# Altium PCB shoe-board-pcb.pcbdoc
Units mm, origin at the board's own origin, x right, y up, seen from the top; angles counter-clockwise.
Board outline 100.89 x 49.4 mm, 2 copper layers (Top Layer, Bottom Layer); 80 components, 95 nets, 252 pads, 198 vias.
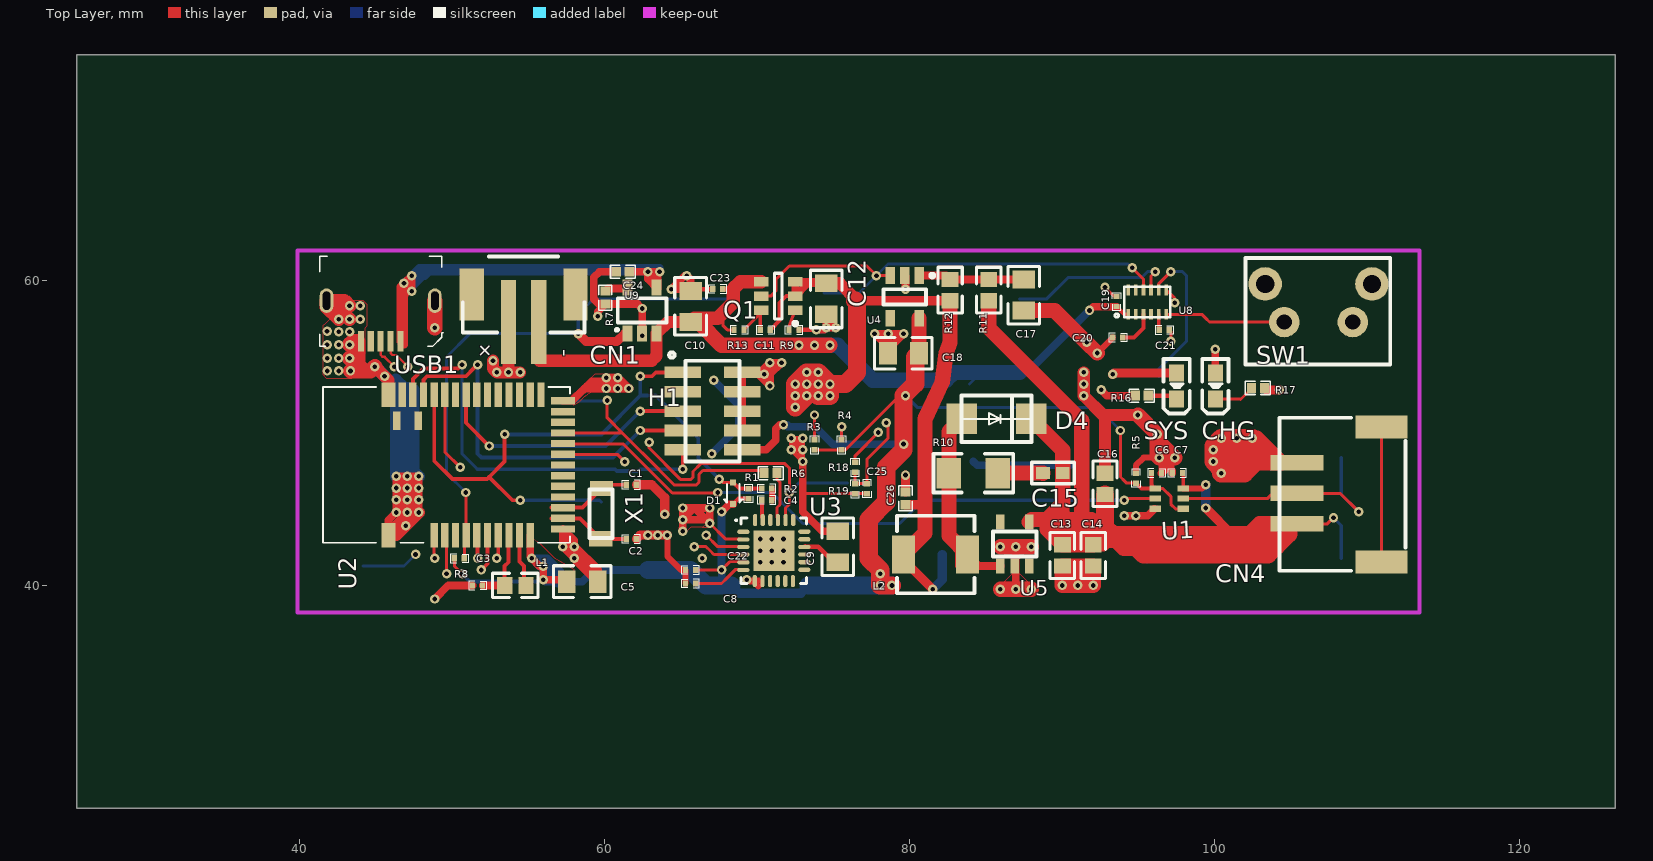
[diagram p0: Top Layer view]
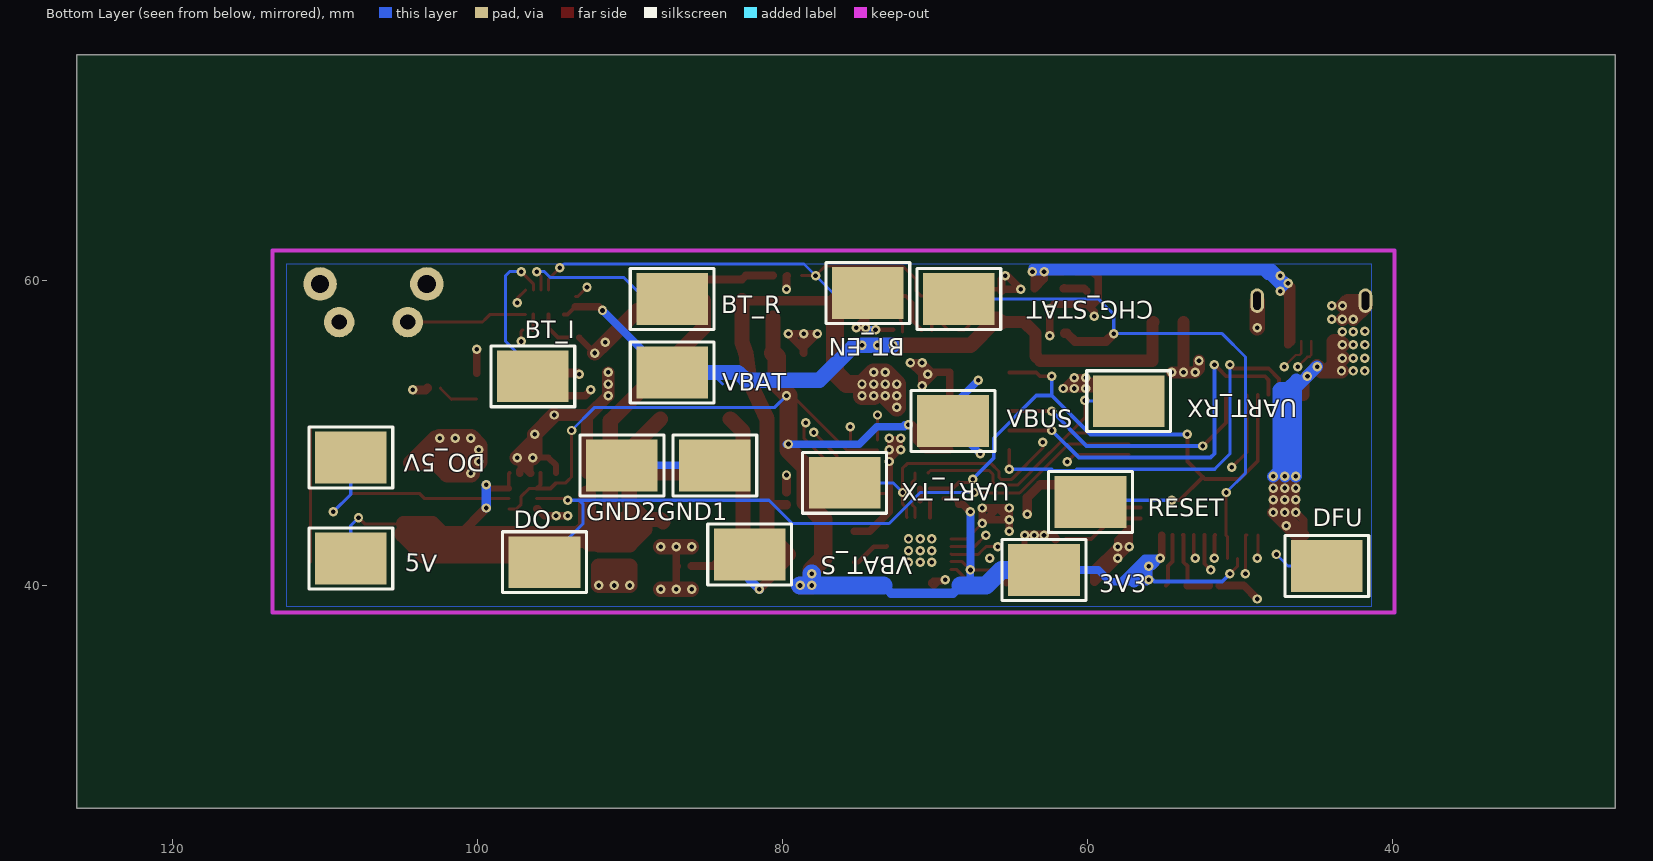
[diagram p1: Bottom Layer view, seen from below]

## Layer stack, top to bottom
Top Layer: signal copper (thickness not stored)
Dielectric: dielectric 0.32, FR-4, Dk 4.8
Bottom Layer: signal copper (thickness not stored)

## Board outline
126.285,25.4 25.4,25.4 25.4,74.803 126.285,74.803

## Components (designator, comment, footprint, x,y, rotation, side; value= is the part's Value field where it differs from the comment)
3V3 "TESTPOINT" undefined#1 62.854,41.021 r0 bottom
5V "TESTPOINT" TESTPOINT_SMT 108.32,41.783 r0 bottom
BT_EN "TESTPOINT" undefined#1 74.411,59.182 r0 bottom
BT_I "TESTPOINT" undefined#1 96.382,53.721 r0 bottom
BT_R "TESTPOINT" undefined#1 87.238,58.801 r0 bottom
C1 "22pF" 0201#1 61.838,46.609 r180 top
C2 "22pF" undefined#2 61.838,43.053 r180 top
C3 "1uF" 0201#2 51.678,40.005 r0 top
C4 "100nF" undefined#2 70.728,45.593 r180 top
C5 "10uF" 0805 58.536,40.259 r180 top
C6 "100nF" undefined#2 96.128,47.371 r0 top
C7 "100nF" undefined#2 97.652,47.371 r180 top
C8 "100nF" 0201#2 65.648,40.132 r180 top
C9 "10uF" undefined#3 75.3,42.545 r270 top
C10 "10uF" undefined#3 65.648,58.293 r270 top
C11 "470pF" undefined#2 70.474,56.769 r0 top
C12 "10uF" undefined#3 74.538,58.801 r90 top
C13 "10uF" undefined#4 90.032,42.037 r90 top
C14 "10uF" undefined#4 92.064,42.037 r90 top
C15 "330pF" C0402 89.524,47.371 r0 top
C16 "10uF" undefined#4 92.826,46.609 r270 top
C17 "10uF" undefined#3 87.492,59.055 r90 top
C18 "10uF" undefined#3 79.618,55.245 r0 top
C19 "100nF" undefined#2 93.588,58.547 r90 top
C20 "1uF" 0201#2 93.667,56.261 r0 top
C21 "100nF" undefined#2 96.636,56.769 r0 top
C22 "100nF" 0201#2 65.648,41.021 r180 top
C23 "1uF" 0201#2 67.426,59.436 r180 top
C24 "4.7uF" 0402#1 61.203,60.579 r180 top
C25 "100nF" 0201#2 77.205,46.355 r270 top
C26 "2.2uF" 0402#1 79.745,45.72 r270 top
CHG "FC-1608YOXK-600H08" LED-0603 100.065,53.086 r90 top
CHG_STAT "TESTPOINT" undefined#1 68.442,58.801 r0 bottom
CN1 "JST_2PIN-SMT" JST-PH-2-SMT 54.726,58.293 r0 top
CN4 "S3B-PH-SM4-TB(LF)(SN)" S3B-PH-SM4-TB(LF)(SN) 108.193,45.974 r270 top
D1 "1N4148WT-7" SOD-523 68.442,46.101 r270 top
D4 "SK24" SMA 85.714,50.927 r0 top
DFU "TESTPOINT" TESTPOINT_SMT 44.312,41.275 r0 bottom
DO "TESTPOINT" undefined#1 95.62,41.529 r0 bottom
DO_5V "TESTPOINT" undefined#1 108.32,48.387 r0 bottom
GND1 "TESTPOINT" TESTPOINT_SMT 84.444,47.879 r0 bottom
GND2 "TESTPOINT" TESTPOINT_SMT 90.54,47.879 r0 bottom
H1 "20021121-00010C4LF" SMD-1.27MM-10P-AMPHENOL-H4.55 67.172,51.435 r270 top
L1 "10uH" undefined#4 54.218,40.005 r0 top
L2 "2.2uH" SMD-5X5-0503 81.65,42.037 r0 top
Q1 "NTGD1100LT1G" ONSC-TSOP-6-318G-02_V 71.49,59.055 r180 top
R1 "10KΩ" undefined#2 69.458,46.101 r270 top
R2 "0Ω(0R0)" undefined#2 70.728,46.355 r180 top
R3 "2.2K" undefined#2 73.776,49.149 r90 top
R4 "2.2K" undefined#2 75.554,49.149 r90 top
R5 "10KΩ" undefined#2 94.858,47.117 r270 top
R6 "1K" 0402#2 70.982,47.371 r180 top
R7 "2K" undefined#5 60.06,58.801 r90 top
R8 "2.2K" undefined#2 50.408,41.783 r0 top
R9 "0Ω(0R0)" undefined#2 72.506,56.769 r180 top
R10 "5.1" 1206 84.19,47.371 r0 top
R11 "0Ω" undefined#4 85.206,59.309 r270 top
R12 "0Ω" undefined#4 82.666,59.309 r270 top
R13 "10KΩ(103)" 0201#2 68.823,56.769 r0 top
R16 "200R" 0402#1 95.239,52.451 r0 top
R17 "402" 0402#1 102.859,52.959 r0 top
R18 "80.6K" 0201#2 76.443,47.752 r90 top
R19 "2M" 0201#2 76.443,46.355 r90 top
RESET "TESTPOINT" undefined#1 59.806,45.466 r0 bottom
SW1 "PTS645VH83-2LFS" KEY-7.0*7.0 106.796,58.547 r180 top
SYS "FC-1608YOXK-600H08" LED-0603 97.525,53.086 r90 top
U1 "ADG3301BKSZ-REEL" SC70-6 97.144,45.593 r270 top
U2 "NRF52832_MODULE_MDBT42" BLE_MODULE_RAYTAC_MDBT42 45.836,43.307 r90 top
U3 "CP2104-F03-GM" QFN-24_4X4X05P 71.109,42.291 r0 top
U4 "AP2112K-3.3TRG1" SOT-25 79.618,59.055 r90 top
U5 "TPS613222ADBVT" SOT-23-5#1 86.984,42.799 r0 top
U8 "STM6600" TDFN12-2X3MM 95.62,58.547 r180 top
U9 "MCP73831T-2ATI/OT" SOT-23-5#2 62.473,58.039 r90 top
UART_RX "TESTPOINT" undefined#1 57.3,52.087 r0 bottom
UART_TX "TESTPOINT" undefined#1 75.935,46.736 r0 bottom
USB1 "10118193-0001LF" 10118193-0001LF 45.328,57.277 r180 top
VBAT "TESTPOINT" undefined#1 87.238,53.975 r0 bottom
VBAT_S "TESTPOINT" undefined#1 82.158,42.037 r0 bottom
VBUS "TESTPOINT" undefined#1 68.823,50.8 r0 bottom
X1 "32.768KHz" SMD-3215_2P 59.806,44.831 r270 top

## Footprints (in the part's own frame and the unit in brackets; to place one, negate y for a bottom-side part, rotate by r counter-clockwise, add the part's x,y. Pads: shape width x height; smd on the part's side, far side on the other; paste and mask are expansions set on the pad)
0201#1 [mil]
  rect 13.8x16 smd: 1(-10,0) 2(16,0)
  silkscreen extent -20,-11 26,11
0201#2 [mil]
  rect 13.8x16 smd: 1(-13,0) 2(13,0)
  silkscreen extent -23,-11 23,11
0402#1 [mm]
  rect 0.6x0.65 smd: 1(-0.424,0) 2(0.424,0)
  silkscreen extent -0.82,-0.43 0.81,0.43
0402#2 [mm]
  rect 0.6x0.65 smd: 1(-0.34,0) 2(0.508,0)
  silkscreen extent -0.74,-0.43 0.89,0.43
0805 [mm]
  rect 1.16x1.47 smd: 1(-1.016,0) 2(1.016,0)
  silkscreen extent -1.9,-1.04 1.87,1.03
1206 [mil]
  rect 63x78.74 smd: 1(-63,0) 2(63,0)
  silkscreen extent -103,-50 103,50
10118193-0001LF [mm]
  rect 0.4x1.35 smd: 1(-1.3,1.269) 2(-0.65,1.269) 3(0,1.269) 4(0.65,1.269) 5(1.3,1.269)
  oval 0.9x1.6 hole 0.5 slot 1.201 at 90 deg: 6(-3.55,-1.405) 6(3.55,-1.405)
  silkscreen extent -4.1,-4.31 4,1.6
BLE_MODULE_RAYTAC_MDBT42 [mm]
  rect 1.6x0.9 smd: 1(0,0) 39(9.2,0)
  rect 1.6x0.48 smd: 2(0,-3.001) 3(0,-3.7) 4(0,-4.401) 5(0,-5.099) 6(0,-5.8) 7(0,-6.501) 8(0,-7.2) 9(0,-7.901) 10(0,-8.599) 11(0,-9.3) 25(9.2,-10.001) 26(9.2,-9.3) 27(9.2,-8.599) 28(9.2,-7.901) 29(9.2,-7.2) 30(9.2,-6.501) 31(9.2,-5.8) 32(9.2,-5.099) 33(9.2,-4.401) 34(9.2,-3.7) 35(9.2,-3.001) 36(9.2,-2.3) 37(9.2,-1.599) 38(9.2,-0.9)
  rect 0.48x1.6 smd: 12(0.4,-11.45) 13(1.101,-11.45) 14(1.8,-11.45) 15(2.501,-11.45) 16(3.199,-11.45) 17(3.9,-11.45) 18(4.599,-11.45) 19(5.3,-11.45) 20(6.001,-11.45) 21(6.699,-11.45) 22(7.4,-11.45) 23(8.099,-11.45) 24(8.8,-11.45)
  rect 1.2x0.5 smd: 40(7.501,-0.55) 41(7.501,-1.949)
  silkscreen extent -0.5,-11.9 9.7,4.3
C0402 [mil]
  rect 35.4x31.5 smd: 1(-30,-0.05) 2(21.2,-0.05)
  silkscreen extent -60,-28 51,28
JST-PH-2-SMT [mil]
  rect 39.4x216.5 smd: 1(-40,-39.95) 2(38,-39.95)
  rect 63x133.9 smd: NC1(-135,31.05) NC2(133,31.05)
  silkscreen extent -158,-67 156,129
KEY-7.0*7.0 [mm]
  round 2 hole 1: 1(-2.286,1.27) 2(2.215,1.27)
  round 2.2 hole 1.199: 3(-3.536,-1.229) 4(3.465,-1.229)
  silkscreen extent -4.74,-2.94 4.76,4.06
LED-0603 [mil]
  rect 43x39 smd: 1(33.5,0) 2(-33.5,0)
  silkscreen extent -72,-34 70,34
ONSC-TSOP-6-318G-02_V [mil]
  rect 37.5x24.5 smd: 1(-39.95,39.95) 2(-39.95,2.95) 3(-39.95,-34.05) 4(48.05,-34.05) 5(48.05,2.95) 6(48.05,39.95)
  silkscreen extent -45,-56 14,79
QFN-24_4X4X05P [mm]
  oval 0.8x0.28 smd: 1(-2,1.232) 2(-2,0.732) 3(-2,0.231) 4(-2,-0.267) 5(-2,-0.767) 6(-2,-1.267) 13(2,-1.257) 14(2,-0.757) 15(2,-0.257) 16(2,0.241) 17(2,0.742) 18(2,1.242)
  oval 0.28x0.8 smd: 7(-1.245,-2) 8(-0.744,-2) 9(-0.244,-2) 10(0.254,-2) 11(0.754,-2) 12(1.255,-2) 19(1.27,2) 20(0.77,2) 21(0.269,2) 22(-0.229,2) 23(-0.729,2) 24(-1.229,2)
  rect 2.68x2.68 smd: 25(0,-0.013)
  silkscreen extent -2.47,-2.16 2.15,2.14
S3B-PH-SM4-TB(LF)(SN) [mm]
  rect 1.5x3.4 smd: 0(-4.425,2.775) 0(4.425,2.775)
  rect 1x3.5 smd: 1(1.925,-2.775) 2(-0.075,-2.775) 3(-2.075,-2.775)
  silkscreen extent -5.03,-3.92 5,4.34
SC70-6 [mil]
  rect 15.7x29.5 smd: 1(-29.95,-40.05) 2(-3.95,-40.05) 3(22.05,-40.05) 4(22.05,31.95) 5(-3.95,31.95) 6(-29.95,31.95)
SMA [mm]
  rect 2x2 smd: 1(-2.286,0) 2(2.286,0)
  silkscreen extent -2.29,-1.52 2.29,1.52
SMD-1.27MM-10P-AMPHENOL-H4.55 [mm]
  rect 0.76x2.4 smd: 1(-2.54,-2.032) 2(-2.54,1.868) 3(-1.27,-2.032) 4(-1.27,1.868) 5(0,-2.032) 6(0,1.868) 7(1.27,-2.032) 8(1.27,1.868) 9(2.54,-2.032) 10(2.54,1.868)
  silkscreen extent -3.86,-2.93 3.3,1.7
SMD-5X5-0503 [mm]
  rect 1.5x2.5 smd: 1(-2.032,0) 2(2.168,0)
  silkscreen extent -2.47,-2.54 2.61,2.54
SMD-3215_2P [mil]
  rect 39.37x60 smd: 1(-60,0) 2(69.75,-2)
  silkscreen extent -58,-31 68,28
SOD-523 [mm]
  rect 0.399x0.399 smd: 1(0.763,-0.001) 2(-0.659,-0.001)
  silkscreen extent -0.56,-0.61 0.66,0.61
SOT-23-5#1 [mm]
  rect 0.551x1 smd: 1(-1.015,-1.524) 2(-0.075,-1.524) 3(0.865,-1.524) 4(0.865,1.372) 5(-1.015,1.372)
  silkscreen extent -1.5,-0.89 1.35,0.74
SOT-23-5#2 [mm]
  rect 1.06x0.65 smd: 1(-1.501,0.95) 2(-1.501,0) 3(-1.501,-0.95) 4(1.499,-0.95) 5(1.499,0.95)
  silkscreen extent -1.33,-1.6 0.8,1.71
SOT-25 [mil]
  rect 43.5x24.5 smd: 1(50.05,-40.05) 2(50.05,-3.05) 3(50.05,33.95) 4(-59.95,33.95) 5(-59.95,-40.05)
  silkscreen extent -25,-79 55,52
TDFN12-2X3MM [mm]
  rect 0.25x0.701 smd: 1(1.27,0.762) 2(0.771,0.762) 3(0.271,0.762) 4(-0.23,0.762) 5(-0.729,0.762) 6(-1.229,0.762) 7(-1.229,-0.838) 8(-0.729,-0.838) 9(-0.23,-0.838) 10(0.271,-0.838) 11(0.771,-0.838) 12(1.27,-0.838)
  silkscreen extent -1.48,-1.04 2.14,0.96
TESTPOINT_SMT [mm]
  rect 4.7x3.4 smd: P$1(0,0)
  silkscreen extent -2.75,-2 2.75,2
undefined#1 [mm]
  rect 4.7x3.4 smd: P$1(0,0)
  silkscreen extent -2.75,-2 2.75,2
undefined#2 [mm]
  rect 0.351x0.406 smd: 1(-0.254,0) 2(0.406,0)
  silkscreen extent -0.51,-0.28 0.66,0.28
undefined#3 [mm]
  rect 1.16x1.47 smd: 1(-1.016,0) 2(1.016,0)
  silkscreen extent -1.9,-1.04 1.87,1.03
undefined#4 [mm]
  rect 1x1.1 smd: 1(-0.761,0) 2(0.639,0)
  silkscreen extent -1.56,-0.8 1.44,0.8
undefined#5 [mm]
  rect 0.6x0.65 smd: 1(-0.34,0) 2(0.508,0)
  silkscreen extent -0.74,-0.43 0.89,0.43

## Via types
v1: diameter 0.62, hole 0.305, Top Layer to Bottom Layer, 198 vias

## Nets (pads, with @x,y where several pads share a name; then routed paths per layer and width w, separated by ;. In a path a pad name is that pad's centre, name@x,y a point inside that pad or via, vN(x,y) a via of type N, cw(c..) or ccw(c..) an arc to the next point about the centre after c; other vN are vias at no path point)
BT_CSRD: C21.1 U8.5 | length 1
  Top Layer w0.254: U8.5 96.349,56.802 C21.1
BT_EN: BT_EN.P$1 Q1.5 U4.3 U8.10 | length 32.9
  Top Layer w0.2: Q1.5 70.907,58.98 71.236,59.309 71.236,60.071 72.125,60.96 72.379,60.96 72.76,60.96 77.205,60.96 v1(77.84,60.325) v1(77.84,60.325) U4.3 ; v1(94.604,60.833) 95.35,60.087 U8.10
  Bottom Layer w0.2: BT_EN.P$1 76.697,59.182 v1(77.84,60.325) 78.602,61.087 94.35,61.087 v1(94.604,60.833)
BT_INT: BT_I.P$1 U8.8 | length 10
  Top Layer w0.2: U8.8 96.349,59.784 v1(97.144,60.579)
  Bottom Layer w0.2: BT_I.P$1 96.382,54.229 98.16,56.007 98.16,60.325 97.906,60.579 v1(97.144,60.579)
BT_PB: SW1.2 U8.6 | length 7.9
  Top Layer w0.2: U8.6 99.176,57.785 99.43,57.531 99.684,57.277 SW1.2
BT_PBOUT: U8.11
BT_PSHLD: U8.4
BT_RST: BT_R.P$1 U8.9 | length 10.9
  Top Layer w0.2: U8.9 95.85,60.301 v1(96.128,60.579)
  Bottom Layer w0.2: BT_R.P$1 89.016,58.801 90.413,60.198 95.239,60.198 95.62,60.579 v1(96.128,60.579)
BT_SR: U8.2
BT_VCCLO: U8.12
BT_VREF: C20.2 U8.3 | length 2.5
  Top Layer w0.254: C20.2 94.734,56.261 95.351,56.876 U8.3@95.351,57.785
CHG_STAT: CHG_STAT.P$1 R8.2 R17.2 U2.5 U9.1 | length 90.8
  Top Layer w0.2: R8.2 50.815,43.186 U2.5 50.935,46.082 v1(50.916,46.101)
  Top Layer w0.6: v1(58.282,56.515) 58.79,56.007 59.044,56.007 60.822,56.007 61.354,56.539 U9.1 ; R17.2 103.411,52.832 v1(104.256,52.832)
  Mid-Layer 2 w0.6: v1(58.282,56.515) 58.282,56.388 59.679,54.991 62.473,54.991 65.648,58.166 89.27,58.166 90.413,57.023 101.716,57.023 104.256,54.483 v1(104.256,52.832)
  Bottom Layer w0.2: v1(50.916,46.101) 49.646,47.371 49.646,54.991 51.17,56.515 v1(58.282,56.515) 58.282,57.785 58.79,58.293 59.298,58.801 CHG_STAT.P$1
DCC: L1.2 U2.10 | length 3.5
  Top Layer w0.254: U2.10 54.434,41.567 54.726,41.275 54.726,40.135 L1.2
DEC4: C3.2 L1.1 U2.9 | length 4.9
  Top Layer w0.254: L1.1 53.456,41.275 53.71,41.529 53.71,43.307 U2.9
  Top Layer w0.5: C3.2 L1.1
DFU: DFU.P$1 U2.34 | length 15.8
  Top Layer w0.2: U2.34 49.536,48.751 v1(50.535,47.752)
  Mid-Layer 1 w0.2: v1(47.614,42.037) 47.614,42.164 49.646,44.196 49.646,46.863 v1(50.535,47.752)
  Bottom Layer w0.2: DFU.P$1@44.185,41.275 46.852,41.275 v1(47.614,42.037)
DTR: C4.2 U3.23 | length 1.1
  Top Layer w0.254: C4.2 70.33,45.585 U3.23@70.33,44.45
FRST: U2.38
GND: C1.1 C2.1 C3.1 C5.1 C6.2 C7.2 C8.2 C9.1 C10.1 C12.1 C13.1 C14.1 C16.1 C17.1 C18.1 C19.2 C20.1 C21.2 C22.2 C23.2 C24.2 C25.2 C26.1 CN1.1 CN4.3 GND1.P$1 GND2.P$1 H1.2 H1.4 H1.6 H1.8 R5.1 R7.1 R9.1 R16.1 R19.1 SW1.1 SW1.3 SW1.4 U1.3 U2.1 U2.12 U2.24 U2.39 U3.2 U3.25 U4.2 U5.2 U8.7 U9.2 USB1.5 USB1.6 | length 271.3
  Top Layer w0.2: v1(66.918,44.069) 67.927,43.061 U3.2@68.95,43.061 ; 73.014,46.006 73.033,46.025 R19.1 C25.2 ; v1(92.826,59.563) 93.436,58.953 C19.2 ; U8.7 97.398,58.837 v1(97.398,58.547) ; C21.2 97.144,56.667 v1(97.144,56.007)
  Top Layer w0.3: C10.1 65.775,59.436 C23.2 ; 72.619,49.251 72.804,49.076 72.804,48.343 v1(73.014,48.133) ; R9.1 v1(73.903,56.769) ; v1(72.252,48.895) v1(72.252,49.657) ; v1(72.252,48.895) v1(73.014,48.133) ; v1(72.252,48.895) v1(73.014,49.657) ; v1(72.252,48.895) v1(73.014,48.895) ; v1(72.252,49.657) v1(73.014,49.657) ; v1(72.252,49.657) v1(73.014,48.895) ; v1(73.014,48.133) v1(73.014,48.895) ; v1(73.014,48.895) v1(73.014,49.657)
  Top Layer w0.4: v1(64.124,43.307) 64.124,41.91 65.013,41.021 C22.2 C8.2 ; v1(92.318,55.245) 93.334,56.261 C20.1 ; R5.1 94.858,47.879 95.366,48.387 v1(96.382,48.387) 96.535,48.235 C6.2
  Top Layer w0.5: v1(48.884,39.116) 49.773,40.005 C3.1 ; 57.266,43.189 57.911,42.545 v1(58.028,42.545) ; U2.24 57.896,52.107 59.192,53.391 59.896,53.391 v1@60.116,53.619 ; 58.71,52.92 58.711,52.919 v1(60.116,52.919) ; 58.852,53.062 59.973,53.062 v1(60.116,52.919) ; 59.453,52.959 60.076,52.959 v1(60.116,52.919) ; v1(59.552,57.658) 59.552,57.953 R7.1 ; C24.2 59.679,60.579 59.308,60.208 59.308,58.791 59.639,58.461 R7.1 ; U9.2 v1(62.473,58.166) 62.179,58.461 R7.1 ; v1(65.14,43.561) v1(65.14,44.323) ; H1.8 H1.6 H1.4 H1.2 ; v1(73.014,48.133) 73.014,44.831 74.284,43.561 C9.1 ; v1(73.903,56.769) 74.411,56.769 v1(74.538,56.896) ; v1@78.633,56.515 78.633,55.276 C18.1 ; U4.2 79.745,60.277 v1(79.745,59.436) ; v1(86.984,39.751) 86.984,41.2 U5.2 86.984,41.35 v1(86.984,42.545) ; v1(90.032,40.005) v1(91.048,40.005) v1(92.064,40.005) ; v1(92.572,52.832) 92.953,52.451 R16.1 ; v1(94.096,44.577) v1(94.858,44.577) 95.62,44.577 96.076,45.033 U1.3 ; v1(96.382,48.387) 97.144,47.625 ; C6.2 97.398,48.235 v1(97.398,48.387) 97.144,48.133 97.144,47.625 ; C7.2 97.246,47.523 97.144,47.625 ; v1@46.356,44.791 46.356,44.919 v1(47.06,45.623) ; v1@46.356,44.791 v1@46.356,45.623 ; v1@46.356,44.791 v1(47.06,44.791) ; v1@46.356,44.791 45.836,44.271 U2.1 45.836,43.567 v1(47.06,44.791) ; v1@46.356,45.623 v1@46.356,46.391 ; v1@46.356,45.623 v1(47.06,45.623) ; v1@46.356,45.623 47.06,44.919 v1(47.06,44.791) ; v1@46.356,46.391 46.356,46.455 v1@47.06,47.159 ; v1@46.356,46.391 v1(47.06,46.391) ; v1@46.356,46.391 v1@46.356,47.159 ; v1@46.356,46.391 47.06,45.687 v1(47.06,45.623) ; v1@46.356,47.159 v1@47.06,47.159 ; v1@46.356,47.159 47.06,46.455 v1(47.06,46.391) ; v1(47.06,44.791) v1(47.828,44.791) ; v1(47.06,44.791) 47.828,45.559 v1(47.828,45.623) ; v1(47.06,45.623) v1(47.06,46.391) ; v1(47.06,45.623) v1(47.828,46.391) ; v1(47.06,45.623) v1(47.828,45.623) ; v1(47.06,45.623) 47.828,44.855 v1(47.828,44.791) ; v1(47.06,46.391) v1@47.06,47.159 ; v1(47.06,46.391) v1@47.828,47.159 ; v1(47.06,46.391) v1(47.828,46.391) ; v1(47.06,46.391) v1(47.828,45.623) ; v1@47.06,47.159 v1@47.828,47.159 ; v1@47.06,47.159 v1(47.828,46.391) ; v1(47.828,44.791) v1(47.828,45.623) ; v1(47.828,45.623) v1(47.828,46.391) ; v1(47.828,46.391) v1@47.828,47.159 ; v1(57.266,42.545) 57.266,43.687 U2.12 58.028,42.965 ; v1(57.266,42.545) v1(58.028,42.545) ; v1(57.266,42.545) v1(58.028,41.783) v1(58.028,42.545) ; v1(57.266,42.545) 57.608,42.545 58.028,42.965 ; v1(58.028,42.545) 58.028,42.965 ; v1(60.116,52.919) v1(60.884,52.919) ; v1(60.116,52.919) v1(60.116,53.623) ; v1(60.116,53.623) v1(60.884,53.623) ; v1(60.116,53.623) 60.82,52.919 v1(60.884,52.919) ; v1(60.884,52.919) v1(61.588,52.919) v1(60.884,53.623) ; v1(60.884,52.919) v1(60.884,53.623) ; v1(65.14,44.323) v1(65.14,45.085) ; v1(65.14,44.323) 66.664,44.323 v1(66.918,44.069) ; v1(65.14,44.323) 65.902,45.085 ; v1(65.14,45.085) v1(66.918,45.085) ; v1(65.14,45.085) 65.902,45.085 ; 65.902,45.085 v1(66.918,44.069) ; 65.902,45.085 v1(66.918,45.085) ; v1(66.918,44.069) v1(66.918,45.085) ; H1.2 70.22,53.975 v1(70.855,54.61) ; H1.2 70.728,53.975 70.855,53.848 ; H1.2 69.966,53.975 v1(70.855,53.086) 70.855,53.848 ; 70.855,53.848 v1(71.617,54.61) v1(70.855,54.61) ; 70.855,53.848 v1(70.855,54.61) ; v1(74.538,56.896) C12.1 74.538,57.531 v1(75.173,56.896) v1(74.538,56.896) ; C18.1 78.602,55.499 v1(79.618,56.515) v1(78.602,56.515) v1(77.713,56.515) 78.602,55.626 C18.1 ; v1(64.378,59.436) 65.521,59.436 C10.1 65.648,60.071 v1(65.394,60.325) 65.267,60.325 v1(64.378,59.436)
  Top Layer w0.6: v1(58.028,41.783) C5.1 59.552,41.021 v1(58.028,42.545) ; C2.1 62.346,43.307 v1(62.854,43.307) v1(63.489,43.307) v1(64.124,43.307) ; C1.1 63.108,46.609 63.956,45.761 v1(63.956,44.663) ; v1(62.473,56.388) U9.2 ; C26.1 v1(79.745,47.244)
  Top Layer w0.8: v1(44.947,54.356) v1(45.582,53.721) 45.836,53.467 U2.39 ; U2.1 46.344,43.307 v1(46.964,43.927) v1(47.828,44.791) ; v1(52.694,54.737) 52.694,54.229 v1(52.948,53.975) v1(53.71,53.975) ; CN1.1 v1(53.71,53.975) ; v1(54.472,53.975) v1(53.71,53.975) ; v1(91.429,53.975) v1(91.429,53.213) v1(91.429,52.451) 92.699,51.181 92.953,51.181 ; C16.1 92.826,51.054 92.953,51.181 ; v1(94.985,51.181) 92.953,51.181
  Top Layer w0.9: v1(42.58,57.463) 41.778,58.265 USB1.6@41.778,58.682 ; v1(43.282,58.345) 42.945,58.682 USB1.6@41.778,58.682 ; v1(43.284,57.463) 42.065,58.682 USB1.6@41.778,58.682
  Top Layer w1: v1(43.284,54.903) 43.413,54.903 44.245,54.071 ; v1(43.284,55.799) 43.494,56.008 43.823,56.008 43.823,54.345 44.096,54.071 ; v1(43.348,54.071) 44.662,54.071 v1(44.947,54.356) ; USB1.6@48.878,58.682 v1(48.878,56.902) v1@48.884,56.896 ; v1(85.968,39.751) v1(86.984,39.751) v1(88,39.751) ; v1(85.968,42.545) v1(86.984,42.545) v1(88,42.545) ; C17.1 89.524,58.039 v1(91.62,55.944) v1(92.318,55.245) ; v1(94.985,51.181) v1(96.255,49.911) ; v1(96.382,48.387) 96.255,48.514 v1(96.255,49.911) ; v1(97.398,48.387) 96.255,49.53 v1(96.255,49.911) ; v1(99.938,48.133) 100.022,48.049 CN4.3@104.402,48.049 ; v1(99.938,48.895) 103.556,48.895 CN4.3@104.402,48.049 ; v1(100.446,47.371) 101.462,48.387 v1(101.462,49.657) ; v1(102.478,49.657) 102.794,49.657 CN4.3@104.402,48.049 ; C13.1 91.048,40.26 v1(91.048,40.005) 92.064,41.021 C14.1 ; C13.1 v1(90.032,40.005) v1(92.064,40.005) C14.1 ; C13.1 C14.1
  Top Layer w1.2: v1(100.446,47.371) 100.446,47.625 v1(99.938,48.133) v1(99.938,48.895) 99.938,49.149 v1(100.446,49.657) ; v1(100.446,47.371) v1(100.446,49.657) ; v1(100.446,47.371) 101.716,47.371 101.97,47.371 102.905,48.306 103.24,48.306 102.478,49.068 v1(102.478,49.657) v1(101.462,49.657) v1(100.446,49.657)
  Bottom Layer w0.5: v1(73.903,56.769) 74.411,56.769 v1(74.538,56.896) ; GND1.P$1@84.19,48.133 GND1.P$1 GND2.P$1
  Bottom Layer w0.8: v1(44.947,54.356) 46.344,52.959 ; 46.314,53.497 46.852,52.959 46.852,47.366 v1@47.061,47.16 ; v1@46.356,47.159 46.344,47.171 46.344,52.959 ; v1@47.828,47.159 47.487,47.5 47.487,52.832 47.36,52.959 46.344,52.959
  other v1: 70.22,41.529 70.982,41.529 71.744,41.529 66.41,41.783 70.22,42.291 70.982,42.291 71.744,42.291 70.22,43.053 70.982,43.053 71.744,43.053 46.356,44.791 46.356,45.623 46.356,46.391 46.356,47.159 47.06,47.159 47.828,47.159 70.474,53.848 41.812,54.071 42.58,54.071 41.812,54.903 42.58,54.903 41.81,55.784 42.58,55.799 42.58,56.631 43.284,56.631 41.81,56.68 43.988,57.463 43.986,58.345
GPIO_AIN5: U2.6 | length 1.5
  Top Layer w0.254: U2.6@51.638,43.307 51.678,43.264 v1(51.678,41.783)
GPIO_AIN6: U2.7 | length 2.5
  Top Layer w0.254: v1(51.932,41.021) 52.339,41.425 U2.7@52.339,43.307
GPIO_P011: U2.25
GPIO_P012: U2.26
GPIO_P013: U2.27
GPIO_P014: U2.28
GPIO_P015: U2.29
GPIO_P016: U2.30
GPIO_P017: U2.31
GPIO_P019: U2.33
GPIO_P023: U2.41
GPIO_P024: U2.40
GPIO_P027: U2.4
H1_3: H1.3
LED_DOUT: DO.P$1 U1.2 U2.20 | length 46.9
  Top Layer w0.2: U2.20@57.3,49.271 61.245,49.271 64.453,46.065 v1@67.44,46.065 ; v1(94.096,45.593) 94.197,45.693 U1.2
  Bottom Layer w0.2: v1(67.426,46.101) 70.982,46.101 73.014,44.069 79.364,44.069 80.888,45.593 v1(94.096,45.593) ; 93.334,45.593 93.08,45.339 93.08,44.069 DO.P$1
LED_DOUT_5V: CN4.2 DO_5V.P$1 U1.5 | length 16.2
  Top Layer w0.2: U1.5 103.468,45.693 103.494,45.72 103.823,46.049 CN4.2 108.245,46.049 v1(109.463,44.831)
  Bottom Layer w0.2: DO_5V.P$1 108.32,45.974 v1(109.463,44.831)
LED_MNT_1: CN4.0 | length 8.9
  Top Layer w0.2: CN4.0@110.968,41.549 CN4.0@110.968,50.399
PP3300: 3V3.P$1 C5.2 C6.1 C18.2 C22.1 D1.1 H1.10 R1.2 R3.1 R4.1 R5.2 R8.1 U1.1 U1.4 U2.11 U3.5 U4.5 | length 125.8
  Top Layer w0.2: R8.1 50.154,41.275 v1(50.662,40.767) ; C22.1 v1(67.68,41.021) 68.221,41.562 U3.5@68.95,41.562 ; R3.1 R4.1 75.808,48.895 80.634,53.721 C18.2 80.634,53.34 v1(79.745,52.451) ; v1(93.842,50.165) 93.842,47.117 94.096,46.863 94.249,46.711 R5.2 ; U1.1@96.128,46.355 96.636,46.355 97.144,45.847 97.144,45.339 97.452,45.032 U1.4@97.955,45.032
  Top Layer w0.254: D1.1@68.442,45.336 68.798,45.695 R1.2 ; R5.2 95.216,46.352 96.128,46.352 96.128,46.355 95.874,46.609 C6.1
  Top Layer w0.5: U2.11 55.137,41.881 v1(55.234,41.783) 55.742,41.275 v1(55.996,41.275) v1(55.996,40.386) 57.393,40.386 C5.2 ; v1(67.68,44.831) 68.188,45.336 D1.1@68.442,45.336 ; H1.10 70.601,48.895 71.236,49.53 71.236,50.292 71.49,50.546 v1(71.744,50.546)
  Top Layer w1: C18.2 80.637,55.248 U4.5@80.637,57.531
  Top Layer w1.2: v1(78.856,40.005) v1(78.094,40.005) v1(78.094,40.767) 78.094,41.021 77.332,41.783 77.332,44.323 78.475,45.466 78.475,47.752 79.618,48.895 v1(79.618,49.276) 79.618,52.451 80.38,53.213 80.38,54.991 C18.2
  Bottom Layer w0.2: v1(79.745,52.451) 80.507,51.689 92.318,51.689 v1(93.842,50.165)
  Bottom Layer w0.25: v1(50.662,40.767) 51.17,40.259 55.615,40.259 55.742,40.386 v1(55.996,40.386)
  Bottom Layer w0.5: 56.507,40.259 56.631,40.384 56.631,40.767 56.504,40.894 56.504,41.275 56.504,41.529 ; 56.955,40.259 56.955,41.078 ; 57.911,40.259 57.774,40.259 ; 3V3.P$1 59.298,41.021 58.536,40.259 57.774,40.259 ; v1(67.68,44.831) v1(67.68,41.021) 67.695,41.006 67.695,40.005 ; v1@71.998,50.546 71.998,50.419 73.832,50.419 74.975,49.276 v1@79.745,49.276 ; 56.504,41.529 56.25,41.783 v1(55.234,41.783) 55.742,41.275 v1(55.996,41.275) v1(55.996,40.386) 56.123,40.259 57.774,40.259 ; 56.504,41.529 56.955,41.078 ; 56.955,41.078 57.774,40.259
  Bottom Layer w0.6: 68.315,40.005 68.823,39.497 72.887,39.497 73.395,40.005
  Bottom Layer w0.8: v1(55.996,41.275) 56.955,40.316 56.955,40.259
  Bottom Layer w1.2: 3V3.P$1 65.648,41.021 66.664,40.005 68.315,40.005 ; 73.395,40.005 v1(78.094,40.005) ; v1(78.094,40.767) v1(78.094,40.005) ; v1(78.856,40.005) v1(78.094,40.005)
PP5000: 5V.P$1 C7.1 C13.2 C14.2 C15.2 C16.2 CN4.1 D4.2 R11.2 U1.6 U5.4 | length 112.4
  Top Layer w0.2: C14.2 92.195,42.545 94.096,42.545 ; CN4.1 107.411,44.049 v1(107.812,44.45)
  Top Layer w0.254: C7.1 97.957,47.32 U1.6@97.957,46.352
  Top Layer w0.4: U1.6 99.175,46.354 v1(99.43,46.609)
  Top Layer w0.6: v1(99.43,45.085) 101.208,43.307 102.224,43.307
  Top Layer w0.9: C13.2 90.032,43.411 90.944,44.323 ; 90.063,45.369 90.063,44.677 C14.2 92.703,42.676 93.334,43.307
  Top Layer w1: R11.2@85.206,58.671 85.206,56.896 91.302,50.8 91.302,44.323 91.231,44.323 ; U5.4@87.85,44.171 88.003,44.323 89.016,44.323 ; D4.2 90.063,48.865 90.063,47.368 90.063,45.369 89.016,44.323 ; C14.2 90.664,42.676 89.016,44.323 ; 92.064,44.193 91.935,44.323 89.016,44.323 ; 92.064,44.209 90.53,42.675 C13.2@90.032,42.675 ; C16.2 92.826,43.437 92.064,42.675 C13.2@90.032,42.675 ; 101.817,42.037 103.087,43.307 104.767,43.307 ; 104.861,43.401 104.767,43.307 ; CN4.1@104.864,44.049 102.966,44.049 102.224,43.307 104.767,43.307 ; 89.016,44.323 89.016,43.691 C13.2@90.032,42.675
  Top Layer w1.2: 91.445,44.323 92.461,43.307 93.334,43.307 ; C16.2@92.826,45.971 92.826,43.815 93.334,43.307 ; 94.832,43.307 95.382,43.307 96.652,42.037 ; 96.017,43.307 97.287,42.037 ; 97.584,43.307 98.854,42.037 ; 99.192,43.307 100.462,42.037 ; 100.547,43.307 101.817,42.037 ; 102.224,43.307 93.334,43.307 ; 102.812,43.307 103.528,42.591 104.049,42.591 ; 104.861,43.401 103.494,42.037 101.817,42.037 ; 93.334,43.307 94.096,42.545 94.858,42.545 95.366,42.037 97.287,42.037 ; 97.287,42.037 98.854,42.037 ; 98.854,42.037 100.462,42.037 ; 100.462,42.037 101.817,42.037
  Bottom Layer w0.2: v1(107.812,44.45) 108.32,43.942 5V.P$1
  Bottom Layer w0.6: v1(99.43,45.085) v1(99.43,46.609)
Q1_1: Q1.1 R9.2 | length 1.5
  Top Layer w0.2: R9.2@72.125,56.642 72.125,56.769 72.125,57.069 Q1.1@72.506,58.039
Q1_6: C11.1 Q1.6 R13.2 | length 3
  Top Layer w0.2: R13.2 70.27,57.885 Q1.6
  Top Layer w0.254: C11.1 70.22,57.991 Q1.6@70.271,58.039
R2_1: C4.1 R2.1 | length 0.8
  Top Layer w0.4: C4.1 R2.1
R10_2: C15.1 R10.2 | length 3
  Top Layer w1: R10.2 C15.1 C15.1@88.762,47.368
R17_1: CHG.2 R17.1 | length 2.7
  Top Layer w0.2: CHG.2 101.678,52.235 101.716,52.197 102.435,52.916 R17.1
RESET: D1.2 H1.1 R1.1 R2.2 RESET.P$1 U2.35 | length 45.2
  Top Layer w0.2: v1(67.54,46.967) 67.747,46.76 D1.2
  Top Layer w0.254: U2.35 48.836,48.181 50.027,46.99 52.313,46.99 53.456,48.133 v1(53.456,49.911) ; 52.44,47.117 53.964,45.593 v1@54.599,45.593 ; v1(62.346,53.721) 63.108,53.721 63.362,53.975 H1.1 ; D1.2@68.442,46.759 68.846,46.355 R1.1 R2.2
  Bottom Layer w0.2: v1(54.472,45.593) 59.679,45.593 RESET.P$1
  Bottom Layer w0.254: v1(53.456,49.911) 59.806,49.911 62.346,52.451 ; v1(62.346,53.721) 62.346,52.451 ; v1(67.54,46.967) 66.156,48.351 66.156,49.657 63.362,52.451 62.346,52.451
S$21: 
S$23: 
S$28: 
S$30: 
S$43: 
S$45: 
S$47: 
S$67: 
S$69: 
S$76: 
SCL: R4.2 U2.3 | length 42.3
  Top Layer w0.2: U2.3 49.646,43.307 v1(49.646,40.767) ; R4.2 v1(75.554,50.419)
  Mid-Layer 1 w0.2: v1(49.646,40.767) 49.773,40.513 50.662,39.624 76.443,39.624 76.824,40.005 76.824,49.149 v1(75.554,50.419)
SDA: R3.2 U2.2 | length 48.1
  Top Layer w0.2: U2.2 48.837,41.83 v1(48.884,41.783) ; R3.2 v1(73.776,51.181)
  Mid-Layer 1 w0.2: v1(48.884,41.783) 48.63,41.529 48.63,40.767 50.154,39.243 51.17,39.243 77.078,39.243 77.332,39.497 77.332,49.149 77.332,49.657 75.808,51.181 v1(73.776,51.181)
SWDCLK: H1.7 U2.36 | length 25.1
  Top Layer w0.254: U2.36@48.138,52.507 48.138,53.48 48.376,53.721 49.9,53.721 50.916,53.721 51.424,54.229 v1(51.678,54.483) ; v1(62.346,50.165) H1.7
  Bottom Layer w0.254: v1(51.678,54.483) 51.678,48.641 51.932,48.387 60.568,48.387 v1(62.346,50.165)
SWDIO: H1.9 U2.37 | length 27.6
  Top Layer w0.254: U2.37 47.435,53.363 ; U2.37@47.437,52.507 47.437,53.541 48.122,54.229 48.63,54.229 50.408,54.229 v1(50.662,54.483) ; v1(65.14,47.625) H1.9
  Bottom Layer w0.2: v1(50.662,54.483) 50.662,48.641 51.678,47.625
  Bottom Layer w0.254: 51.678,47.625 60.695,47.625 60.822,47.498 62.219,47.498 62.346,47.625 v1(65.14,47.625)
SWO: H1.5 U2.32 | length 17.6
  Top Layer w0.254: U2.32 50.916,52.488 50.916,50.673 v1(52.44,49.149) ; v1(62.346,51.435) H1.5
  Bottom Layer w0.254: v1(52.44,49.149) 60.06,49.149 v1(62.346,51.435)
SYS_2: R16.2 SYS.2 | length 2
  Top Layer w0.3: R16.2 97.309,52.451 SYS.2
U2_15: U2.15
U2_16: U2.16
U2_17: U2.17
U2_18: U2.18
U2_22: U2.22
U2_23: U2.23
U3_1: U3.1
U3_9: U3.9
U3_10: U3.10
U3_11: U3.11
U3_12: U3.12
U3_13: U3.13
U3_14: U3.14
U3_15: U3.15
U3_16: C9.2 U3.16 | length 2.6
  Top Layer w0.3: U3.16@73.167,42.57 73.192,42.545 74.03,42.545 75.046,41.529 C9.2
U3_17: U3.17
U3_18: U3.18
U3_19: U3.19
U3_22: U3.22
U3_24: U3.24
U4_4: U4.4
U5_1: D4.1 L2.2 R10.1 U5.1 | length 13.6
  Top Layer w0.508: L2.2@83.819,42.037 84.581,41.275 U5.1@85.971,41.275
  Top Layer w1: D4.1 82.59,50.089 R10.1 82.59,43.264 L2.2@83.819,42.037 ; L2.2@83.469,42.758 83.492,42.735 L2.2@83.492,41.338
U9_5: R7.2 U9.5 | length 1.7
  Top Layer w0.5: U9.5 U9.5 U9.5@61.584,59.477
  Top Layer w0.508: R7.2 60.228,59.477 U9.5@61.584,59.477
UART_RXD: R6.2 U2.21 UART_RX.P$1 | length 20.8
  Top Layer w0.2: U2.21 61.173,50.006 ; v1(60.178,52.137) 60.178,51.001 61.173,50.006 ; R6.2 70.302,47.544 66.454,47.544 66.197,47.287 66.197,46.774 66.004,46.584 64.597,46.584 62.613,48.567 62.292,48.887 61.173,50.006
  Bottom Layer w0.2: UART_RX.P$1 60.129,52.087 v1(60.178,52.137)
UART_RXD_RES: R6.1 U3.21 | length 3.1
  Top Layer w0.2: R6.1 71.323,46.961 71.508,46.775 71.508,45.367 71.508,45.303 71.316,45.111 71.316,44.461 U3.21@71.328,44.45
UART_TXD: U2.19 U3.20 UART_TX.P$1 | length 25
  Top Layer w0.2: U2.19 60.845,48.607 v1(61.332,48.119) ; v1@62.932,49.399 62.932,49.207 62.932,49.015 64.98,46.967 65.684,46.967 65.813,47.094 65.813,47.48 66.324,47.991 71.828,47.991 72.148,47.671 72.148,46.711 72.148,46.124 v1(72.125,46.101) 72.125,45.72 72.125,45.339 71.871,45.085 71.871,44.493 U3.20@71.828,44.45
  Mid-Layer 1 w0.2: v1(61.332,48.119) 61.652,48.119 v1@62.932,49.399
  Bottom Layer w0.2: v1(72.125,46.101) 72.76,46.736 UART_TX.P$1
  other v1: 62.932,49.399
UART_VDD: C8.1 U3.6 | length 3.4
  Top Layer w0.2: C8.1 67.68,40.132 68.061,40.513 68.61,41.062 U3.6@68.95,41.062
USB1_4: USB1.4
USB_N: U3.4 USB1.2 | length 37.3
  Top Layer w0.16: USB1.2 45.979,55.23 46.09,55.118 46.093,55.115 46.347,55.115 v1(47.106,54.356)
  Top Layer w0.2: v1(65.902,42.545) 66.664,42.545 66.918,42.291 67.172,42.037 68.925,42.037 U3.4@68.95,42.062
  Mid-Layer 1 w0.16: v1(47.106,54.356) 47.36,54.61 47.614,54.61 49.138,54.61 49.265,54.61 50.157,55.441 50.535,55.441 64.124,55.441 65.265,55.441 65.59,55.115 65.844,54.861 65.844,51.054 65.844,43.431 65.844,42.603 v1(65.902,42.545)
USB_P: U3.3 USB1.3 | length 37.6
  Top Layer w0.16: USB1.3 45.328,55.118 45.455,54.991 45.582,54.991 v1(46.217,54.356)
  Top Layer w0.2: v1(66.664,43.307) 67.426,42.545 68.935,42.545 U3.3@68.95,42.56
  Mid-Layer 1 w0.16: v1(46.217,54.356) 46.852,54.991 47.233,54.991 49.138,54.991 50.027,55.753 65.394,55.753 66.156,54.991 66.156,43.561 66.156,43.434 66.283,43.307 v1(66.664,43.307)
VBAT: C10.2 C19.1 C23.1 CN1.2 Q1.4 R13.1 U8.1 U9.3 VBAT.P$1 | length 61.1
  Top Layer w0.2: 67.762,57.866 67.762,57.069 68.061,56.769 R13.1
  Top Layer w0.254: C19.1 94.096,57.785 U8.1
  Top Layer w0.3: C23.1 68.442,59.436
  Top Layer w0.5: v1(91.81,58.039) 92.064,58.293 C19.1
  Top Layer w0.8: CN1.2 55.742,57.226 55.742,54.737 63.108,54.737 63.423,55.052 U9.3 64.161,57.277 C10.2
  Top Layer w0.9: C10.2 65.902,57.531 67.426,57.531 68.442,58.547 68.442,59.436 68.926,59.92 Q1.4
  Top Layer w1: C10.2 66.156,57.277 67.68,55.753 v1(72.76,55.753) v1(73.776,55.753) v1(74.792,55.753)
  Bottom Layer w0.2: 83.936,53.213 84.698,53.975 VBAT.P$1
  Bottom Layer w0.5: VBAT.P$1 87.746,53.975 v1(91.81,58.039)
  Bottom Layer w1: v1(72.76,55.753) v1(73.776,55.753) v1(74.792,55.753) 75.3,55.753 77.586,53.467 82.412,53.467 82.92,53.975 VBAT.P$1
VBAT_SNS: C25.1 R18.1 R19.2 U2.8 | length 48.4
  Top Layer w0.2: R18.1 R19.2 C25.1 77.205,48.26 78.602,49.657 v1@78.602,50.47
  Top Layer w0.254: v1(52.948,41.783) 53.037,41.872 U2.8@53.037,43.307
  Mid-Layer 2 w0.2: v1(52.948,41.783) 52.948,39.751 53.329,39.37 76.57,39.37 76.951,39.751 76.951,41.656 78.602,43.307 81.015,45.72 81.015,49.784 80.126,50.673 v1(78.475,50.673)
VBAT_SYS: C11.2 C12.2 C26.2 L2.1 Q1.2 Q1.3 R12.2 R18.2 SYS.1 VBAT_S.P$1 | length 88.1
  Top Layer w0.2: R18.2 76.443,48.514 v1(77.967,50.038)
  Top Layer w0.254: C11.2 71.49,57.379 71.49,58.547 71.925,58.979 Q1.2@72.506,58.979
  Top Layer w0.5: Q1.2 Q1.3 74.435,59.92 C12.2 73.342,59.817 Q1.2
  Top Layer w0.6: 76.57,58.674 76.574,58.67 R12.2 ; L2.1 79.618,41.656 v1(81.523,39.751) ; C26.2 81.006,45.296 81.015,45.305 ; v1(93.334,53.848) 93.423,53.937 SYS.1
  Top Layer w0.8: C12.2 75.427,59.817 76.57,58.674 76.57,58.547
  Top Layer w1: L2.1 81.015,43.434 81.015,50.927 82.158,53.34 82.412,55.245 82.666,56.007 R12.2@82.666,58.671
  Top Layer w1.2: 76.447,58.67 76.57,58.547 76.57,54.229 76.57,53.975 75.808,53.213 75.554,53.213 v1(74.792,53.213) ; v1(74.792,53.213) v1(74.03,53.975) v1(73.268,53.975) v1(72.506,53.213) v1(72.506,52.451) v1(72.506,51.689) v1(73.268,52.451) v1(73.268,53.213) v1(74.03,53.213) v1(74.03,52.451) v1(74.792,52.451) v1(74.792,53.213)
  Mid-Layer 1 w0.2: v1(74.792,52.451) 74.919,52.324 75.681,52.324 v1(77.967,50.038)
  Mid-Layer 1 w0.6: v1(81.523,39.751) 81.523,40.259 93.588,52.324 93.588,53.594 v1(93.334,53.848)
  Bottom Layer w0.6: v1(81.523,39.751) 82.158,40.386 VBAT_S.P$1
VBUS: C24.1 CHG.1 U3.7 U3.8 U9.4 USB1.1 VBUS.P$1 | length 122.2
  Top Layer w0.3: 70.033,40.208 69.855,40.386 v1(69.331,40.386) ; v1(69.331,40.386) 70.137,40.386 70.314,40.208 70.314,40.099 70.093,39.878 69.814,40.157 69.814,40.208 69.509,40.208 v1(69.331,40.386)
  Top Layer w0.5: C24.1 v1(62.854,60.579) ; CHG.1 v1(100.065,55.499)
  Top Layer w0.509: 63.484,60.107 63.012,60.579 v1(62.854,60.579) ; v1(46.852,59.817) 46.629,59.593 USB1.1 46.852,55.783 46.852,59.055 47.106,59.309 v1(47.36,59.309) ; v1(46.852,59.817) v1(47.36,60.325) v1(47.36,59.309) ; v1(46.852,59.817) v1(47.36,59.309) ; v1(62.854,60.579) v1(63.616,60.579) 63.484,60.447 63.484,59.477 62.854,60.107 v1(62.854,60.579)
  Mid-Layer 1 w0.5: 63.616,59.551 63.616,59.817 v1(62.854,60.579) v1(63.616,60.579) 63.616,58.039 64.759,56.896 65.648,56.896 67.172,55.372 v1(67.172,53.467) ; 65.521,56.896 70.093,56.896 71.109,57.912 88.889,57.912 89.905,56.896 96.255,56.896 96.636,57.277 97.271,57.277 97.525,57.531 98.033,57.531 v1(100.065,55.499) ; v1(67.045,48.641) 67.299,48.641 68.95,46.99 68.95,40.64 69.077,40.64 v1(69.331,40.386)
  Bottom Layer w0.5: v1(67.045,48.641) 68.823,50.419 VBUS.P$1 68.823,51.816 v1(67.172,53.467)
  Bottom Layer w0.509: v1@47.36,59.563 48.087,60.289 ; 48.087,60.579 48.087,60.289 ; 48.506,60.579 48.216,60.289 48.087,60.289 ; v1(47.36,60.325) v1(47.36,59.309) v1(46.852,59.817) v1(47.36,60.325) ; v1(47.36,60.325) 47.396,60.289 48.087,60.289 ; v1(47.36,60.325) 47.614,60.579 v1(62.854,60.579) v1(63.616,60.579) 63.616,60.833 63.108,60.833 47.868,60.833 v1(47.36,60.325)
VLDO_IN: C17.2 R11.1 R12.1 U4.1 | length 7
  Top Layer w0.508: U4.1@80.637,60.325 82.41,60.325 R12.1 R11.1 C17.2
XTAL_1: C2.2 U2.13 X1.2 | length 5.5
  Top Layer w0.254: U2.13@56.525,44.407 58.407,44.407 X1.2 61.427,43.058 C2.2
XTAL_2: C1.2 U2.14 X1.1 | length 5.5
  Top Layer w0.254: U2.14@56.525,45.105 58.559,45.105 X1.1 60.06,46.609 C1.2
pads on no net: CN1.NC1 CN1.NC2 U5.3 U5.5

## Polygon pours and split planes (outlines as drawn)
GND on Mid-Layer 1 (solid): 41.137,60.96 41.137,38.608 112.638,38.608 112.638,61.214
GND on Mid-Layer 2 (solid): 41.391,61.087 41.391,38.608 112.511,38.608 112.511,61.087
GND on Bottom Layer (solid): 41.391,61.087 41.391,38.608 112.511,38.608 112.511,61.087
PP3300 on Top Layer (solid): 55.234,43.053 55.234,41.783 55.996,41.275 55.996,40.259 57.774,40.259 58.028,41.021 56.758,41.783 55.742,42.799
GND on Top Layer (solid): 86.73,40.767 86.222,40.259 87.746,40.259 87.238,40.767 86.984,40.513
GND on Top Layer (solid): 86.222,42.037 86.73,41.783 87.238,41.783 87.492,42.037
GND on Top Layer (solid): 65.14,45.085 66.918,45.085 66.918,44.069 66.41,43.815 65.648,43.815 65.394,43.561 64.886,43.561
GND on Top Layer (solid): 66.41,43.815 66.918,43.815 67.172,44.069 67.172,44.323
GND on Top Layer (solid): 57.812,52.407 59.412,53.879 60.948,53.879 61.844,53.047 61.844,52.791 61.652,52.663 61.396,52.663 59.092,52.663 58.644,52.343 58.324,52.023 58.004,51.831 57.94,52.087
GND on Top Layer (solid): 44.312,56.769 44.312,56.896 44.439,57.023 44.439,58.42 44.185,58.674 42.915,58.674 42.661,58.42 42.661,57.912 42.534,57.785 42.28,57.785 41.645,57.15 41.518,57.023 41.518,53.848 41.772,53.594 42.153,53.594 42.534,53.594 43.169,53.594 43.423,53.594 43.677,53.848 43.677,55.245 44.312,55.245 44.312,56.261 44.312,56.515

## Other copper
Mid-Layer 1:
  pour cut-out: 41.01,53.34 45.328,53.34 45.455,42.545 41.01,42.418
  pour cut-out: 43.931,51.689 45.582,51.689 48.503,51.689 48.376,47.371 45.455,47.371 43.677,47.244
Mid-Layer 2:
  pour cut-out: 41.137,53.34 45.328,53.34 45.455,42.418 41.137,42.418
  pour cut-out: 48.503,47.371 45.201,47.371 45.201,51.943 48.503,51.943
Bottom Layer:
  pour cut-out: 41.01,53.34 45.328,53.34 45.455,43.053 41.01,43.053
  pour cut-out: 45.201,51.816 48.503,51.816 48.503,47.244 45.201,47.244

## Text inside footprints (layer, text, board x,y; h text height)
CN1: Top Overlay "+" at 52.038,54.723 h1.02 r45; Top Overlay "-" at 57.724,55.016 h1.02 r90
U2: Document "KEEPOUT / (ANTENNA AREA)" at 38.71,42.367 h0.61 r90
USB1: Document "REF" at 46.548,59.242 h1 r180